# Altium PCB Integration_Power.PcbDoc
Units mil, origin at the board's own origin, x right, y up, seen from the top; angles counter-clockwise.
Board outline 2100 x 1470 mil, 2 copper layers (Top Layer, Bottom Layer); 16 components, 9 nets, 58 pads, 13 vias.
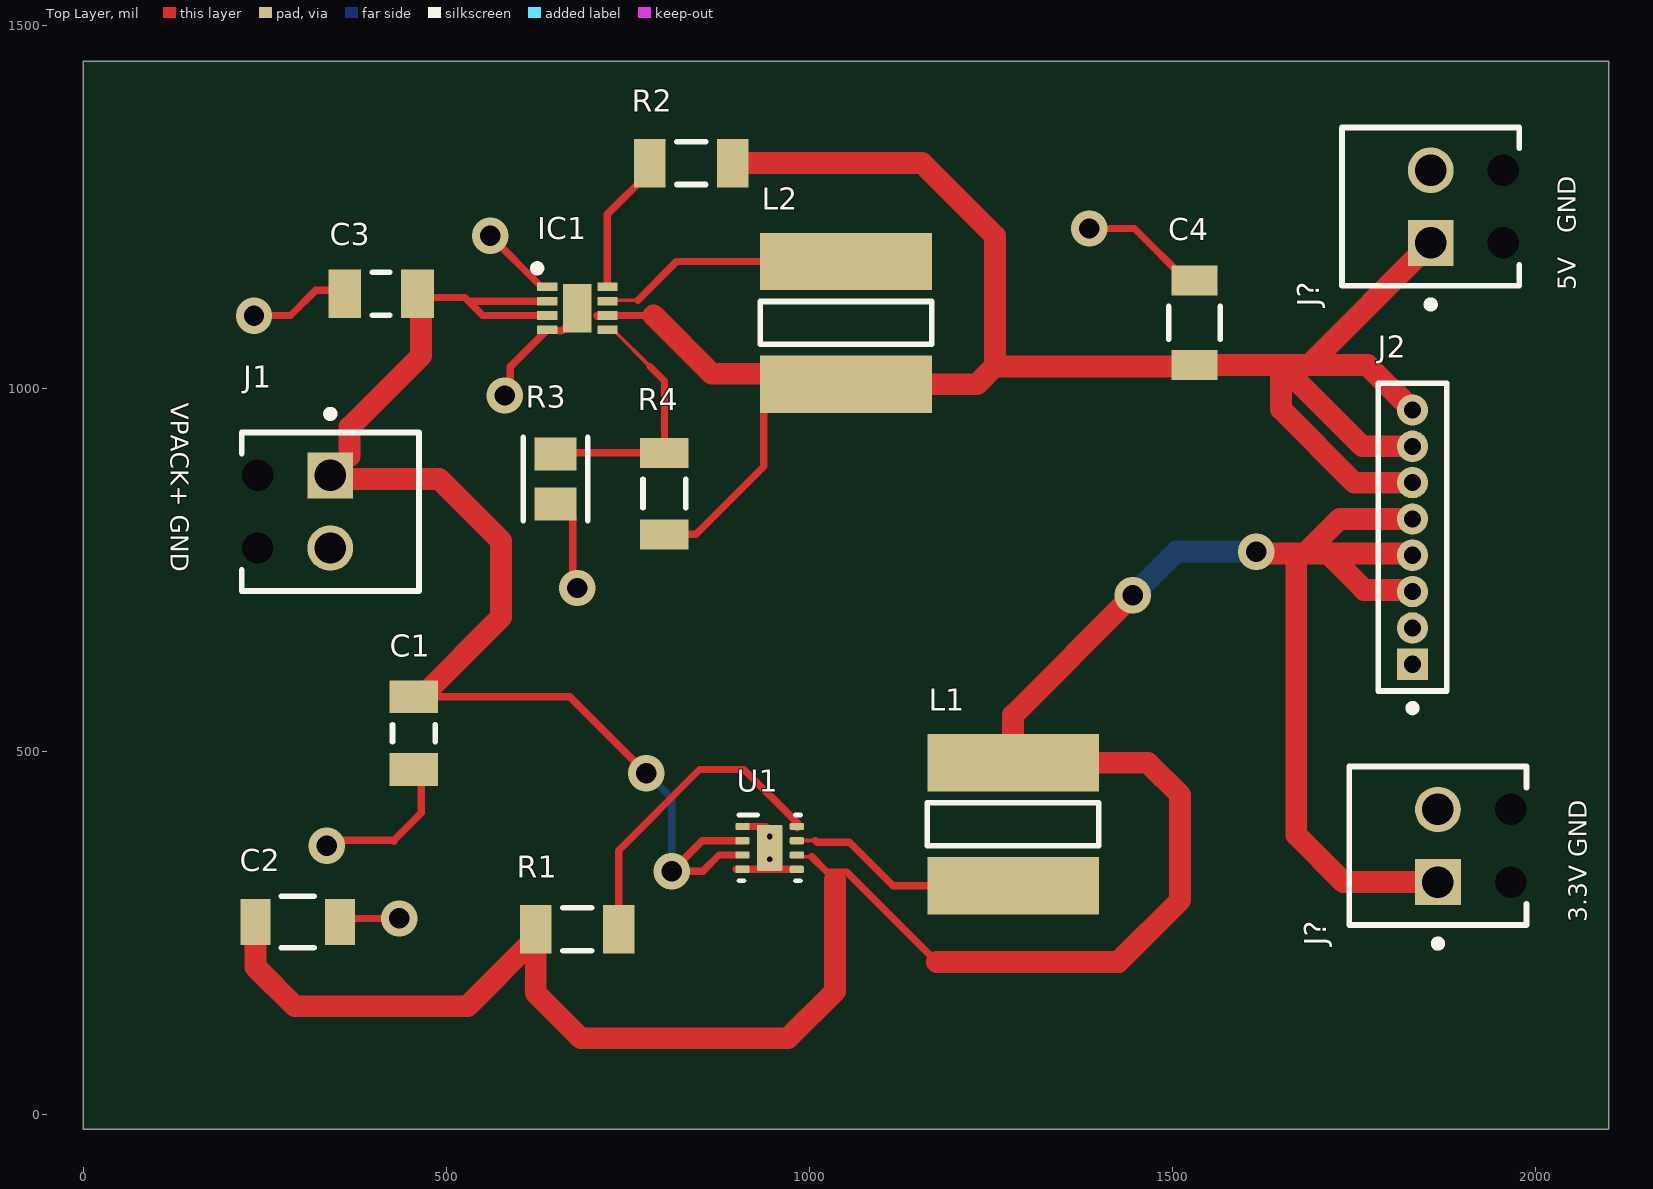
[diagram p0: Top Layer view]
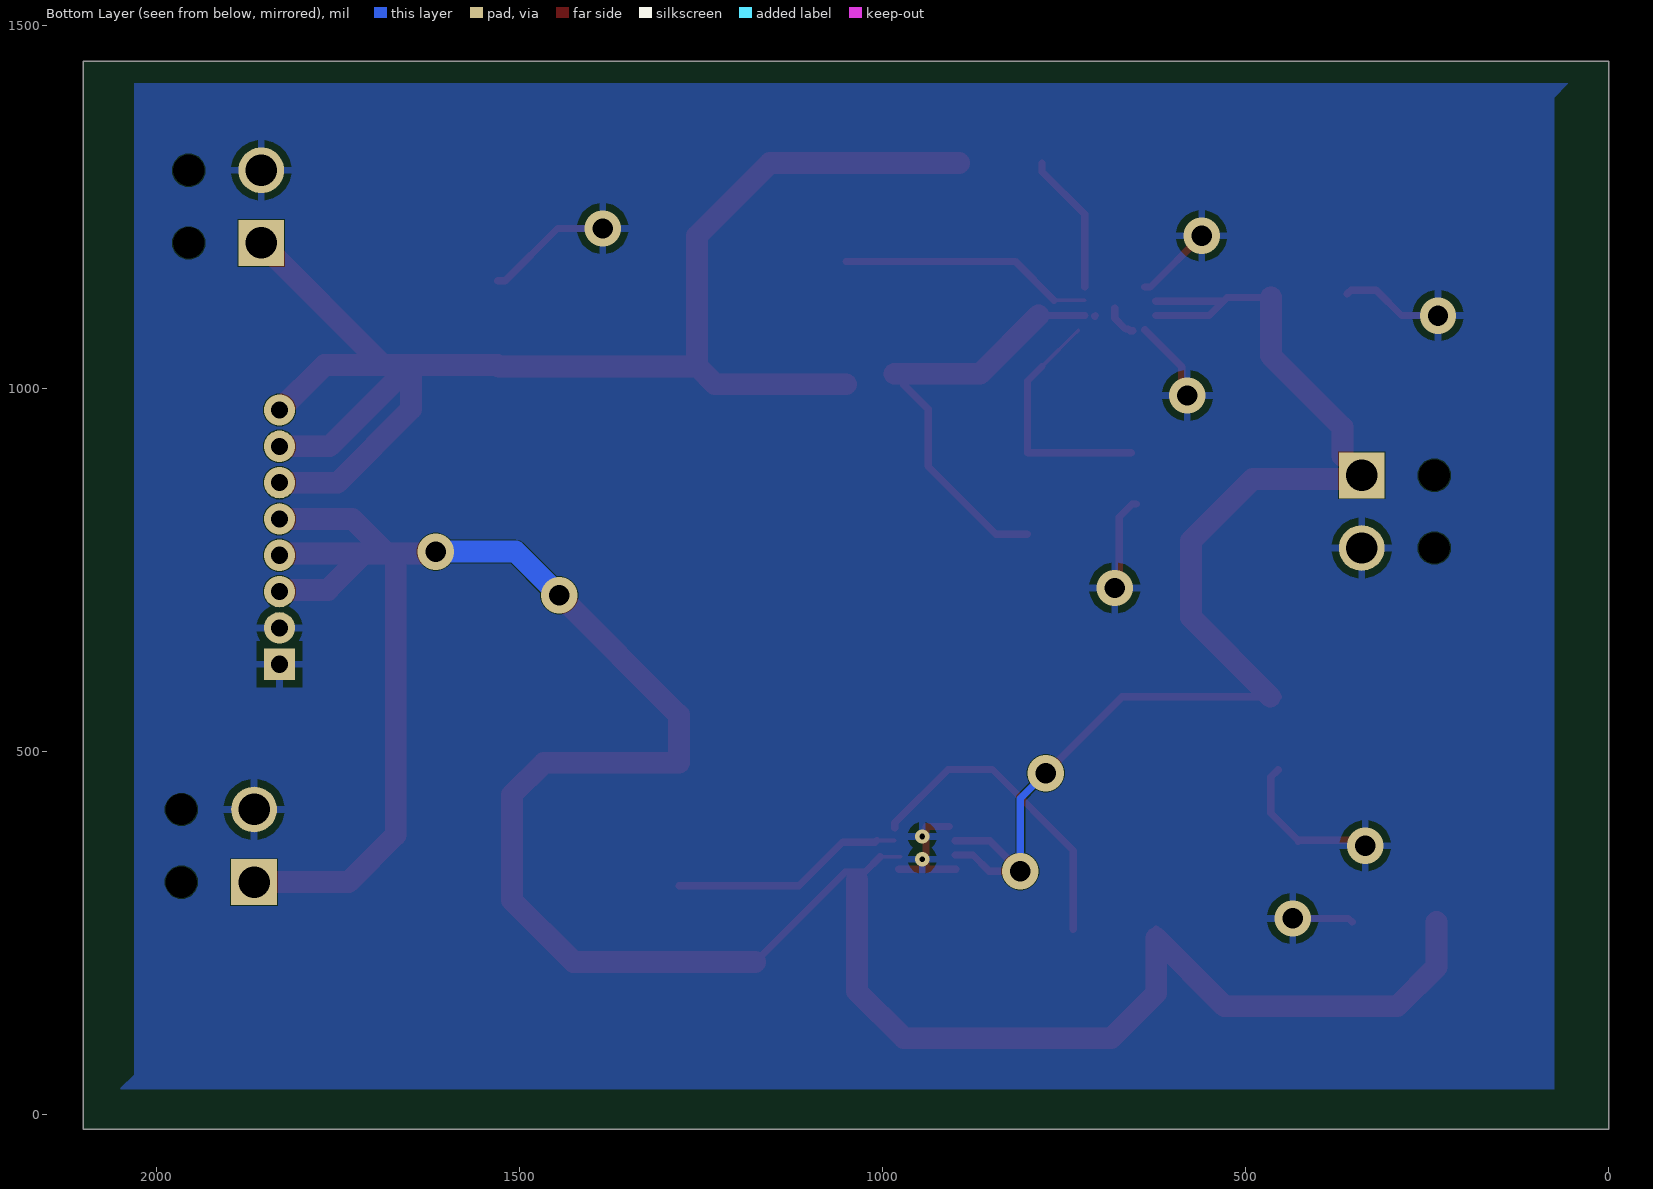
[diagram p1: Bottom Layer view, seen from below]
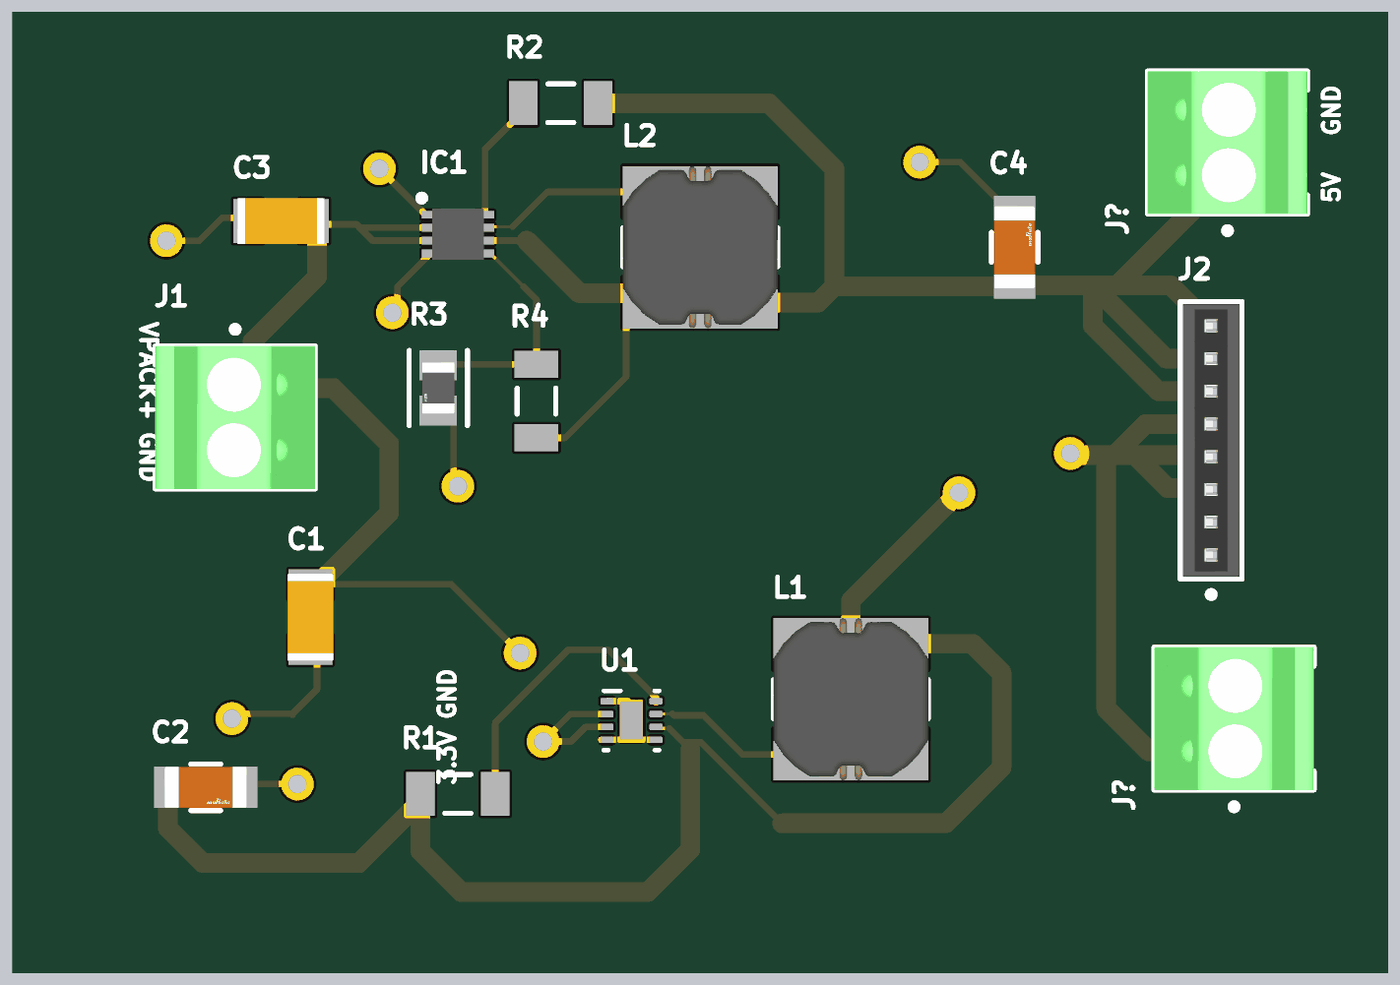
[diagram p2: 3D render of the assembled board from above, using the file's embedded part models]

## Layer stack, top to bottom
Top Solder: solder mask 0.4, Solder Resist, Dk 3.5
Top Layer: signal copper 1.4
Dielectric 1: dielectric 12.6, FR-4, Dk 4.8
Bottom Layer: signal copper 1.4
Bottom Solder: solder mask 0.4, Solder Resist, Dk 3.5

## Board outline
0,-20 0,1450 2100,1450 2100,-20

## Design rules (kind name [scope] priority, off if disabled: settings)
Clearance [All] p1: gap=1 ignorepadtopadclearanceinfootprint=FALSE
MinimumSolderMaskSliver [All] p1: minsoldermaskwidth=1
PolygonConnect [All] p1: connectstyle=Relief reliefconductorwidth=10 reliefentries=4 polygonreliefangle="90 Angle" airgapwidth=10
RoutingVias [All] p1: holewidth=28 width=50 viastyle="Through Hole" minholewidth=28 minwidth=50 maxholewidth=28 maxwidth=50
SilkToSolderMaskClearance [IsPad] p1: minsilkscreentomaskgap=7 clearancetoexposedcopper=TRUE
SolderMaskExpansion [All] p1: expansion=4 istentingtop=FALSE
SupplyNets "Schematic Supply Nets" [InNet('GND')] p1: voltage=0.000
Width [All] p1: maxlimit=35 minlimit=1 preferedwidth=5
28 further rules are at their usual default settings.

## Classes and differential pairs
component class Integration_Power: C1 C2 C3 C4 IC1 J1 J2 J? L1 L2 R1 R2 R3 R4 U1

## Components (designator, comment, footprint, x,y, rotation, side; value= is the part's Value field where it differs from the comment)
C1 "GRM31CR71C106KAC7L" CAPC3216X180X55LL20T25 455,525 r90 top
C2 "GRM31CR71A226KE15L" FP-GRM31C-0_2-e0_3_0_8-MFG 295,265 r0 top
C3 "GRM31CR71C106KAC7L" CAPC3216X180X55LL20T25 410,1130 r0 top
C4 "GRM31CR71A226KE15L" FP-GRM31C-0_2-e0_3_0_8-MFG 1530,1090 r90 top
IC1 "TPS62160DSGR" SON50P200X200X80-9N 680,1110 r0 top
J1 "1725656" PHOE-1725656-2 340,830 r270 top
J2 "LPPB081NFFN-RC" FP-LPPB081NFFN-RC-MFG 1830,795 r90 top
J? "1725656" PHOE-1725656-2 1855,1250 r90 top
J? "1725656" PHOE-1725656-2 1865,370 r90 top
L1 "SRN6045-2R2Y" BOUR-SRN6045_V 1280,399.65 r90 top
L2 "SRN6045-2R2Y" BOUR-SRN6045_V 1050,1090 r270 top
R1 "CRCW1206100KFKEA" RESC3216X60X45NL10T20 680,255 r0 top
R2 "CRCW1206100KFKEA" RESC3216X60X45NL10T20 837.09,1310 r0 top
R3 "RR1220P-184-D" FP-RR1220-IPC_B 650,875 r270 top
R4 "RC1206FR-07953KL" RESC3116X65X40NL10T20 800,855 r90 top
U1 "TPS62162DSGR" DSG0008A_V 944.97,367.13 r0 top

## Footprints (in the part's own frame and the unit in brackets; to place one, negate y for a bottom-side part, rotate by r counter-clockwise, add the part's x,y. Pads: shape width x height; smd on the part's side, far side on the other; paste and mask are expansions set on the pad)
BOUR-SRN6045_V [mm] "SMD, 2-Leads, Body 6x6mm"
  rect 2x6 smd: 1(-2.15,0) 2(2.15,0)
  silkscreen extent -0.75,-3 0.75,3, body extent -3.15,-3 3.15,3, height 4.5
CAPC3216X180X55LL20T25 [mm] "Chip Capacitor, 2-Leads, Body 3.4x1.8mm, IPC High Density"
  rect 1.15x1.7 smd: 1(-1.275,0) 2(1.275,0)
  silkscreen extent -0.3,-0.75 0.3,0.75, body extent -1.7,-0.9 1.7,0.9, height 1.8
DSG0008A_V [mm] "SON, 8-Leads, Body 2x2mm, Pitch 0.5mm, Thermal Pad 1.6x0.9mm, TI Recommended"
  rrect40% 0.5x0.25 smd: 1(-0.95,0.75) 2(-0.95,0.25) 3(-0.95,-0.25) 4(-0.95,-0.75) 5(0.95,-0.75) 6(0.95,-0.25) 7(0.95,0.25) 8(0.95,0.75)
  rrect11% 0.9x1.6 smd paste-0.45: 9(0,0)
  silkscreen extent -1.07,-1.15 1.07,1.15, body extent -1.05,-1.05 1.05,1.05, height 0.8
FP-GRM31C-0_2-e0_3_0_8-MFG [mm]
  rect 1.05x1.6 smd paste+0 mask+0: 1(-1.475,0) 2(1.475,0)
  silkscreen extent -0.58,-0.9 0.58,0.9, body extent -2.1,-1 2.1,1, height 0.25
FP-LPPB081NFFN-RC-MFG [mm]
  rect 1.1x1.1 hole 0.6 paste-2539.97 mask+0: 1(-4.445,0)
  round 1.1 hole 0.6 paste-2539.97 mask+0: 2(-3.175,0) 3(-1.905,0) 4(-0.635,0) 5(0.635,0) 6(1.905,0) 7(3.175,0) 8(4.445,0)
  silkscreen extent -6.1,-1.2 5.38,1.2, body extent -5.48,-1.3 5.48,1.3, height 0.25
FP-RR1220-IPC_B [mil]
  rect 45.47x57.33 smd paste+0 mask+0: 1(-34.47,0) 2(34.47,0)
  silkscreen extent -57,-44 57,44, body extent -67,-39 67,39, height 10
PHOE-1725656-2 [mm] "Connector, 2-Leads, Body 6.2x5.4mm, Pitch 2.54mm"
  rect 1.6x1.6 hole 1.1: 1(-1.27,0)
  round 1.6 hole 1.1: 2(1.27,0)
  round 0 hole 1.1 unplated: MH1(-1.27,-2.54) MH2(1.27,-2.54)
  silkscreen extent -3.54,-3.1 2.77,3.1, body extent -2.77,-3.1 2.77,3.1, height 9
RESC3116X65X40NL10T20 [mm] "Chip Resistor, 2-Leads, Body 3.10x1.60mm, IPC Medium Density"
  rect 1.05x1.7 smd: 1(-1.425,0) 2(1.425,0)
  silkscreen extent -0.5,-0.75 0.5,0.75, body extent -1.6,-0.85 1.6,0.85, height 0.65
RESC3216X60X45NL10T20 [mm] "Chip Resistor, 2-Leads, Body 3.20x1.60mm, IPC Medium Density"
  rect 1.1x1.7 smd: 1(-1.45,0) 2(1.45,0)
  silkscreen extent -0.5,-0.75 0.5,0.75, body extent -1.65,-0.85 1.65,0.85, height 0.6
SON50P200X200X80-9N [mm]
  rect 0.7x0.3 smd: 1(-1.05,0.75) 2(-1.05,0.25) 3(-1.05,-0.25) 4(-1.05,-0.75) 5(1.05,-0.75) 6(1.05,-0.25) 7(1.05,0.25) 8(1.05,0.75)
  rect 1x1.7 smd: 9(0,0)
  silkscreen extent -1.52,1.28 -1.27,1.52, body extent -1,-1 1,1, height 0.77

## Part data
C1 C3: library part CMP-2000-06352-1, "Chip Capacitor, 10 uF, +/- 10%, 16 V, -55 to 125 degC, 1206 (3216 Metric), RoHS, Tape and Reel", Capacitance=10µF, Manufacturer=Murata, Operating Temperature=-55°C~125°C, Package / Case=1206(3216Metric), Package Description="2-Pin Surface Mount Device, Body 3.2 x 1.6 mm", Package Reference=1206, Ratings=-, Standard Package=1, Temperature Coefficient=X7R, Tolerance=±10%, Voltage - Rated=16V, Applications=GeneralPurpose, Catalog Drawings=GRMSeries_1206_1.6, Category=Capacitors, Datasheet URL=http://search.murata.co.jp/Ceramy/image/img/A01X/G101/ENG/GRM31CR71C106KAC7-01.pdf, Datasheet Version=03/2016, Family=CeramicCapacitors, Featured Product=GA3SafetyRecognizedCapsandHi-CapMLCC, Features=-, Height - Seated (Max)=-, Lead Spacing=-, Lead Style=-, Manufacturer URL=http://www.murata.com/, Mounting Technology=SurfaceMount, Mounting Type=SurfaceMount,MLCC, Online Catalog=GRMSeries, Other Names=490-3911-6, Packaging=Digi-Reel®, Product Training Modules=High-CapMultilayerCeramicCapacitors, Series=GRM, Size / Dimension="0.126\"Lx0.063\"W(3.20mmx1.60mm)", Thickness (Max)="0.071\"(1.80mm)"
C2 C4: library part CMP-06035-003841-1, "Chip Multilayer Ceramic Capacitors for General Purpose, 1206, 22uF, X7R, 15%, 10%, 10V", Capacitance=22uF, Case Code (Imperial)=1206, Case Code (Metric)=3216, Dielectric=X7R, Max Operating Temperature=125°C, Min Operating Temperature=-55°C, Package Quantity=1, Tolerance=10%, Voltage=10V, Case/Package=1206, Depth=1.6mm, Height=1.6mm, Lead Free="Lead Free", Length=3.2mm, Material=Ceramic, Mount="Surface Mount", Packaging="Tape and Reel", Radiation Hardening=No, REACH SVHC="No SVHC", Termination=SMD/SMT, Thickness=0.071inch, Voltage Rating=10V, Voltage Rating (DC)=10V, Width=0.063inch
IC1: "Integrated Circuit", Manufacturer_Name="Texas Instruments", Mouser Part Number=595-TPS62160DSGR, Arrow Part Number=TPS62160DSGR, Arrow Price/Stock=https://www.arrow.com/en/products/tps62160dsgr/texas-instruments?region=nac, Datasheet Link=http://www.ti.com/lit/gpn/tps62160, Height=0.8mm, Manufacturer_Part_Number=TPS62160DSGR, Mouser Price/Stock=https://www.mouser.co.uk/ProductDetail/Texas-Instruments/TPS62160DSGR?qs=gXEV9p%2FxLgfRqf5wXx2iGg%3D%3D
J1 J? J?: library part CMP-2000-05299-1, "Male Header, Pitch 2.54 mm, 1 x 2 Position, Height 9 mm, Tail Length 3.5 mm", Colour=Green, Manufacturer="Phoenix Contact", Content=250pc(s), Datasheet URL=http://datasheet.octopart.com/1725656-Phoenix-Contact-datasheet-5302866.pdf, Datasheet Version=Apr-08, Industrial packaging=Yes, Manufacturer part No.=1725656, Manufacturer URL=http://www.phoenixcontact.com/, Number of contacts=2, Pitch=2.54mm, Type=MPT0,5/2-2,54
J2: library part CMP-25680-000039-1, "CONN HDR 8POS 0.05 GOLD PCB", Package Quantity=1, Connector Type=Header, Contact Plating=Gold, Contact Type="Female Socket", Lead Free="Lead Free", Mount="Through Hole", Number of Positions=8, Number of Rows=1, Packaging=Bulk, Pitch=0.05inch, RoHS Compliant=Yes, Termination=Solder
L1 L2: library part CMP-2000-07142-1, "Semi-Shielded Power Inductor, 2.2 uH, +/- 30%, 3.5 A, -40 to 125 degC, 2-Pin SMD, RoHS, Tape and Reel", Current - Saturation=6A, Current Rating=3.5A, DC Resistance (DCR)=25.1mOhmMax, Frequency - Self Resonant=35MHz, Frequency - Test=100kHz, Inductance=2.2µH, Manufacturer=Bourns, Operating Temperature=-40°C~125°C, Package / Case=Nonstandard, Package Description="2-Pin Surface Mounted Device, Body 6 x 6 mm", Package Reference=SRN6045, Q @ Freq=15@7.96MHz, Standard Package=1, Tolerance=±30%, 3D Model=SRN6045.stp, Category=Inductors,Coils,Chokes, Datasheet URL=http://www.bourns.com/docs/Product-Datasheets/SRN6045.pdf, Datasheet Version=12/2014, EDA / CAD Models=DownloadfromAcceleratedDesigns, Family=FixedInductors, Height - Seated (Max)="0.177\"(4.50mm)", Kits="SRN-LAB1-ND / -INDUCTORKIT", Manufacturer URL=http://www.bourns.com/, Material - Core=Ferrite, Mounting Technology=SurfaceMount, Mounting Type=SurfaceMount, Online Catalog=SRNSeries, Other Names=SRN6045-2R2YCT, Packaging=CutTape(CT), PCN Assembly/Origin=MagneticproductsOct/2013, Product Training Modules=SRNSeries:Semi-ShieldedInductors, RoHS Information=SRN6045SeriesMaterialDeclaration, Series=SRN6045, Shielding=Shielded, Size / Dimension="0.236\"Lx0.236\"W(6.00mmx6.00mm)", Type=Wirewound
R1 R2: library part CMP-1014-00736-2, Manufacturer="Vishay Dale", Part Number=CRCW1206100KFKEA
R3: library part CMP-2001-03296-2, "180kΩ ±0.5% 0.1W 1/10W Chip Resistor 0805 (2012 Metric) Thin Film", Case Code (Imperial)=0805, Case Code (Metric)=2012, Max Operating Temperature=125°C, Max Power Dissipation=100mW, Min Operating Temperature=-55°C, Package Quantity=1, Resistance=180kR, Resistor Type="Thin Film", Temperature Coefficient=25ppm/°C, Tolerance=0.5%, Voltage Rating=100V, Case/Package=0805, Depth=1.25mm, Height=0.4mm, Height - Seated (Max)=0.02inch, Lead Free="Lead Free", Length=2mm, Mount="Surface Mount", Number of Terminations=2, Packaging="Tape and Reel", Power Rating=100mW, RoHS Compliant=Yes, Series=RR, Size Code=0805, Technology="THIN FILM", Termination=SMD/SMT, Voltage Rating (DC)=100V, Width=0.049inch
R4: library part CMP-1014-00847-2, Manufacturer=Yageo, Part Number=RC1206FR-07953KL
U1: library part CMP-0323-00316-3, "Buck Step Down Regulator with 3 to 17 V Input and 3.3 V Output, -40 to 85 degC, 8-Pin WSON (DSG), Green (RoHS & no Sb/Br)", Manufacturer="Texas Instruments", Rating=Catalog, Switch Current Limit(Typ)(A)=1.8, Code_JEDEC=MO-229, ComponentLink1Description=Datasheet, ComponentLink1URL=http://www.ti.com/general/docs/lit/getliterature.tsp?genericPartNumber=TPS62162&fileType=pdf, ComponentLink2Description="Package Specification", ComponentLink2URL=http://www.ti.com/litv/pdf/mpds308a, ComponentLink3Description="URL Link1", ComponentLink3URL="Samples URL:http://www.ti.com/product/tps62162#samples", DatasheetVersion=SLVSAM2A, Duty Cycle(Max)(%)=100, Eco-Plan="Green (RoHS & no Sb/Br)", Iout(Max)(A)=1, Iq(Typ)(mA)=0.017, Mounting Technology="Surface Mount", PackageDescription="8-Pin Plastic Small Outline No-Lead, 2 x 2 x 0.8 mm Body, 0.5 mm Pitch, Exposed Pad", PackageReference=DSG0008A, PackageVersion="revB, Oct-2010", PartNumber=TPS62162DSGR, Preset Vout(V)=3.3, Regulated Outputs(#)=1, SubFamily="Step-Down Regulator", Synchronous Rectification=TRUE, Topology=Buck, Vin(Max)(V)=17, Vin(Min)(V)=3, Vout(Max)(V)=3.3, Vout(Min)(V)=3.3

## Via types
v1: diameter 50, hole 28, Top Layer to Bottom Layer, 11 vias
v2: diameter 19.68, hole 7.87, Top Layer to Bottom Layer, 2 vias

## Nets (pads, with @x,y where several pads share a name; then routed paths per layer and width w, separated by ;. In a path a pad name is that pad's centre, name@x,y a point inside that pad or via, vN(x,y) a via of type N, cw(c..) or ccw(c..) an arc to the next point about the centre after c; other vN are vias at no path point)
3.3V: C2.1 J2.3 J2.4 J2.5 J?.1@1865,320 L1.2 R1.1 U1.6 | length 3880.3
  Top Layer w5: U1.6@974.8,355 1002.7,355
  Top Layer w10: R1.1@622.91,243.19 R1.1 ; 1002.7,355 1023.85,333.85 ; 1035,322.7 1023.85,333.85 ; 1175,210 1051.15,333.85 1035,333.85 1023.85,333.85 ; v1(1615,775) v1@1617.5,772.5 ; J2.4@1827.5,772.5 J2.4
  Top Layer w30: C2.1 236.93,203.07 290.86,149.14 528.87,149.14 622.91,243.19 622.91,167.09 685,105 970,105 1035,170 1035,322.7 ; 1175,210 1425,210 1510,295 1510,440 1465.71,484.29 L1.2 1280,550 v1(1445,715) ; v1@1617.5,772.5 1670,772.5 ; 1682.5,772.5 1730,820 J2.5 ; J2.4@1827.5,772.5 1713.12,772.5 ; J2.3 1827.72,722.28 1763.35,722.28 1713.12,772.5 ; J?.1@1865,320 1735,320 1670,385 1670,772.5 ; 1670,772.5 1713.12,772.5
  Bottom Layer w30: v1(1445,715) 1505,775 v1(1615,775)
5V: C4.1 IC1.6 J2.6 J2.7 J2.8 J?.1@1855,1200 L2.2 R2.2 R4.1 | length 2745.1
  Top Layer w10: 706.34,1100.16 IC1.6@707.56,1098.94 ; IC1.6 785,1100.16 ; R4.1 843.54,798.9 936.89,892.24 936.89,970.98 L2.2@971.26,1005.35
  Top Layer w30: 785,1100.16 865.16,1020 L2.2@983.66,1020 ; R2.2 1155,1310 1255,1210 1255,1030 ; L2.2 1230.35,1005.35 1255,1030 ; C4.1@1528.07,1030 1255,1030 ; C4.1 1649.04,1031.93 ; J2.6 1750,870 1649.04,970.96 1649.04,1031.93 ; J2.7 1760.96,920 1649.04,1031.93 ; J2.8 1768.07,1031.93 1686.93,1031.93 ; J?.1@1855,1200 1686.93,1031.93 ; 1649.04,1031.93 1686.93,1031.93
GND: C1.1 C2.2 C3.1 C4.2 IC1.1 IC1.4 IC1.9 J1.2 J2.1 J2.2 J?.2 R3.2 U1.1 U1.4 U1.5 U1.9 | length 1184.3
  Top Layer w10: v1(235,1100) 285,1100 320,1135 354.8,1135 C3.1 ; v1(335,370) 342.65,377.65 427.65,377.65 ; C2.2 358.07,270 v1(435,270) ; 427.65,375.86 427.65,377.65 ; C1.1 465,464.8 465,415 427.65,377.65 ; v1@560,1210 v1(560.31,1210) 630.79,1139.53 IC1.1 ; v1(580,990) 587.65,997.65 587.65,1029.47 IC1.4 ; R3.2 655.93,840.53 673.67,822.79 673.67,731.33 v1(680,725) ; 655,1079.25 658.65,1079.25 660.94,1081.54 665.31,1081.54 680,1096.22 IC1.9 ; U1.4@899,337.6 U1.9@940,337.6 ; U1.1 940,396.65 940,382.87 U1.9@940,337.6 ; U1.5@977.4,337.6 U1.9@940,337.6 ; v1(1385,1220) 1447.24,1220 1519.17,1148.07 C4.2
  other v2: 944.97,351.38 944.97,382.87
NetIC1_5: IC1.5 R3.1 R4.2 | length 341
  Top Layer w5: IC1.5@730,1080 730,1079.68 732.62,1077.07 732.93,1077.07 780,1030
  Top Layer w10: R3.1@657.08,911.1 R4.2 800,1010 780,1030
NetIC1_7: IC1.7 L2.1 | length 350.8
  Top Layer w5: IC1.7@721.34,1121.29 763.71,1121.29
  Top Layer w10: 763.71,1121.29 817.06,1174.65 L2.1
NetIC1_8: IC1.8 R2.1 | length 194.8
  Top Layer w10: IC1.8 721.34,1239.53 780,1298.19 R2.1
NetL1_1: L1.1 U1.7 | length 322.6
  Top Layer w5: U1.7@983.15,377.28 1007.72,377.28
  Top Layer w10: 1007.72,377.28 1010,375 1054.68,375 1114.68,315 L1.1
NetR1_2: R1.2 U1.8 | length 437.8
  Top Layer w10: R1.2 737.09,363.66 848.43,475 909.28,475 982.72,401.57 U1.8@982.72,394.61
Vin: C1.2 C3.2 IC1.2 IC1.3 J1.1 U1.2 U1.3 | length 1774
  Top Layer w10: J1.1 J1.1@345,875 ; C1.2 465.83,575.2 669.8,575.2 v1(775,470) ; C3.2@465,1125.2 465.2,1125 525,1125 530.16,1119.84 ; 623.66,1100.16 549.84,1100.16 530.16,1119.84 ; 623.66,1119.84 530.16,1119.84 ; U1.3@900,357.28 875,357.28 852.72,335 v1(810,335) 851.97,376.97 U1.2@900,376.97
  Top Layer w30: J1.1@345,875 490,875 575,790 575,684.37 C1.2@465.83,575.2 ; J1.1@366.5,906.5 366.5,946.5 465,1045 C3.2@465,1125.2
  Bottom Layer w10: v1(775,470) 810,435 v1(810,335)
pads on no net: J1.MH1 J1.MH2 J?.MH1 J?.MH2

## Polygon pours and split planes (outlines as drawn)
GND on Bottom Layer "GND_L02_P000" (solid, pour order 0): 55,1420 75,1400 75,35 2050,35 2030,55 2030,1420

## Silkscreen, mask and mechanical layers (free items; w line width, h text height)
Top Overlay:
  text "5V   GND" at 2055,1135 h25 r90
  text "VPACK+ GND" at 120,980 h25 r270
  text "3.3V GND" at 2070,265 h25 r90
Mechanical 1:
  the board outline again, w10